# Altium PCB HDsEMG.PcbDoc
Units mm, origin at the board's own origin, x right, y up, seen from the top; angles counter-clockwise.
Board outline 76 x 31 mm, 2 copper layers (Top Layer, Bottom Layer); 160 components, 101 nets, 493 pads, 88 vias.
Unrouted connection lines stored in the file: 1.
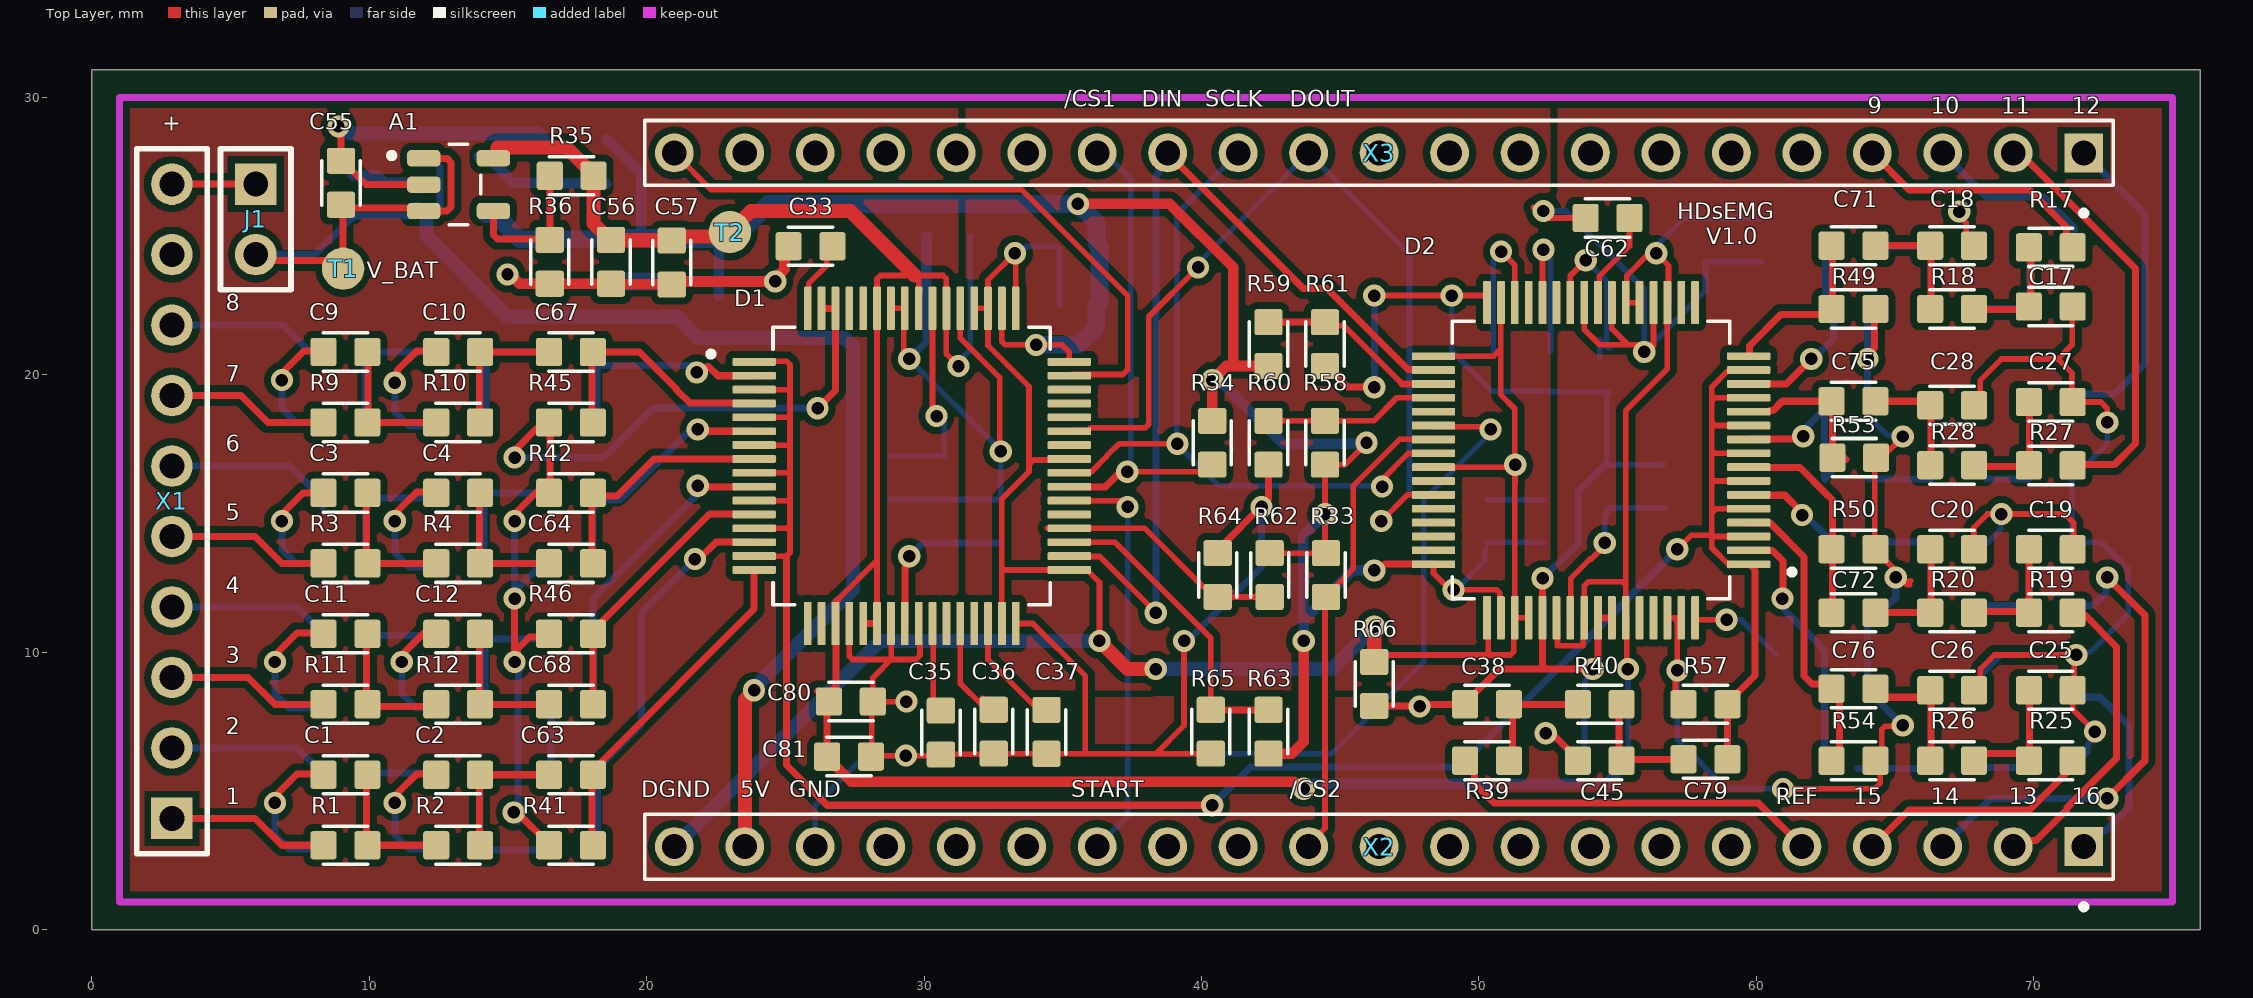
[diagram p0: Top Layer view]
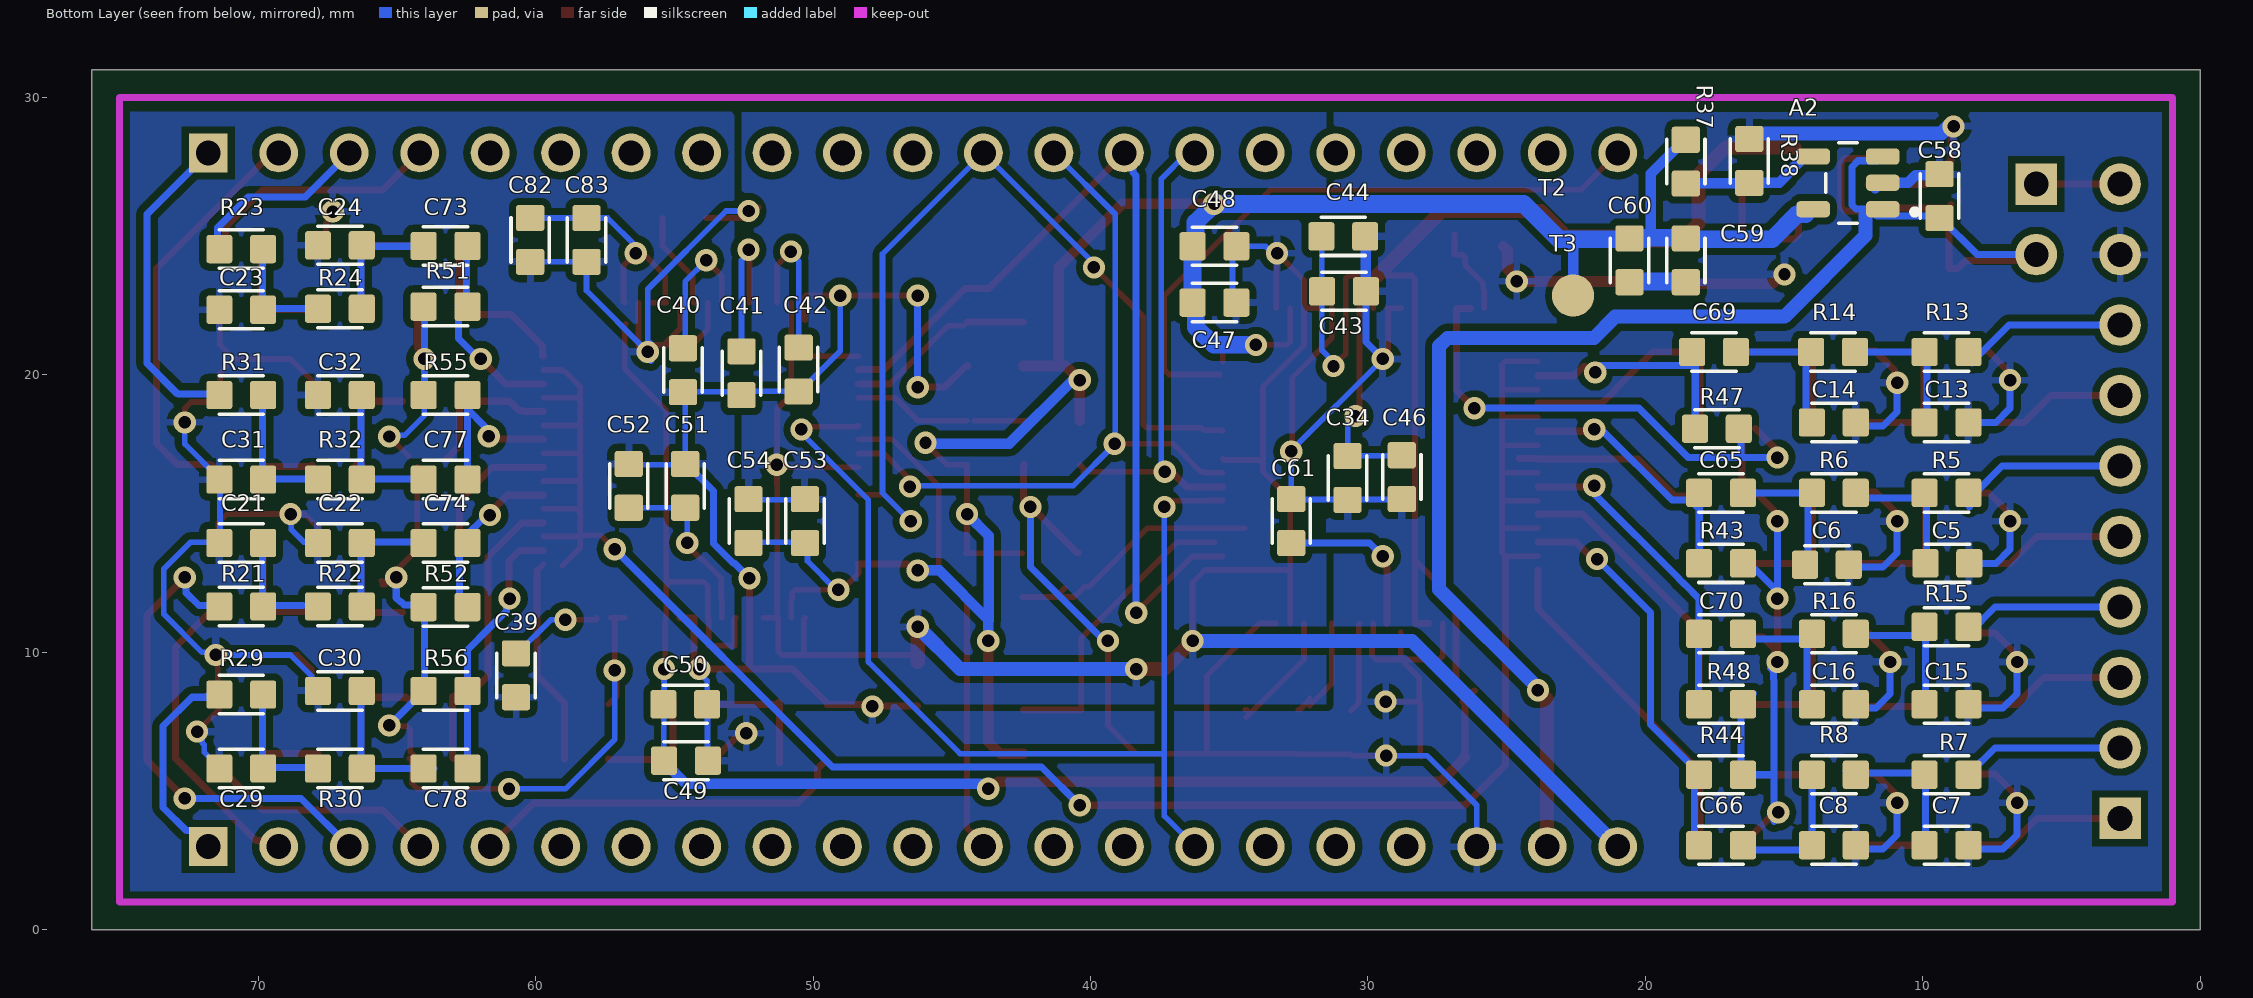
[diagram p1: Bottom Layer view, seen from below]
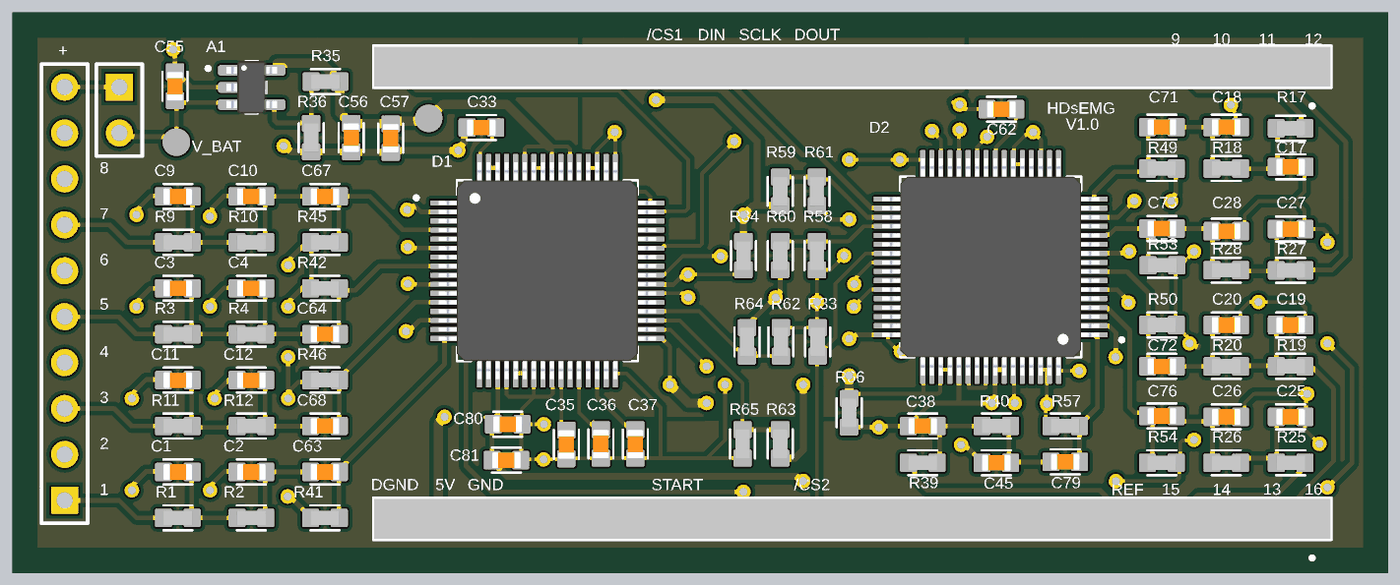
[diagram p2: 3D render of the assembled board from above, using the file's embedded part models]
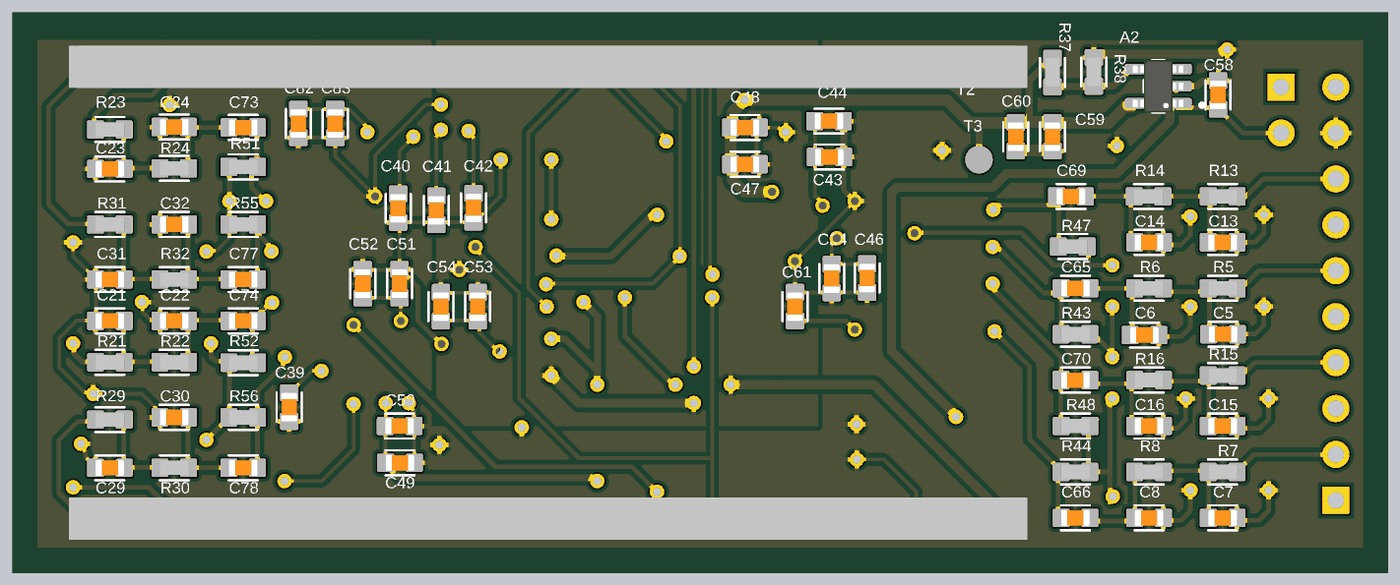
[diagram p3: 3D render of the assembled board from below, using the file's embedded part models]

## Layer stack, top to bottom
Top Solder: solder mask 0.01, Solder Resist, Dk 3.5
Top Layer: signal copper 0.036
Dielectric 1: dielectric 0.32, FR-4, Dk 4.8
Bottom Layer: signal copper 0.036
Bottom Solder: solder mask 0.01, Solder Resist, Dk 3.5

## Board outline
0,0 0,31 76,31 76,0

## Design rules (kind name [scope] priority, off if disabled: settings)
Clearance [All] p1: gap=0.254 ignorepadtopadclearanceinfootprint=TRUE except(0.127: Arc-SMDPad Track-SMDPad)
PolygonConnect [All] p1: connectstyle=Relief reliefconductorwidth=0.254 reliefentries=4 polygonreliefangle="90 Angle" airgapwidth=0.254
RoutingVias [All] p1: holewidth=0.711 width=1.27 viastyle="Through Hole" minholewidth=0.711 minwidth=1.27 maxholewidth=0.711 maxwidth=1.27
SolderMaskExpansion [All] p1: expansion=0.102 istentingtop=FALSE
Width [All] p1: maxlimit=1.016 minlimit=0.203 preferedwidth=0.254 minimp=50.000000 maximp=50.000000 favimp=50.000000
30 further rules are at their usual default settings.

## Classes and differential pairs
component class "Power supply": A1 A2 C55 C56 C57 C58 C59 C60 J1 R35 R36 R37 R38 R66 T1 T2 T3
component class Input2: C17 C18 C19 C20 C21 C22 C23 C24 C25 C26 C27 C28 C29 C30 C31 C32 C38 C45 C71 C72 C73 C74 C75 C76 C77 C78 C79 R17 R18 R19 R20 R21 R22 R23 R24 R25 R26 R27 R28 R29 R30 R31 R32 R39 R40 R49 R50 R51 R52 R53 R54 R55 R56 R57
component class Input1: C1 C2 C3 C4 C5 C6 C7 C8 C9 C10 C11 C12 C13 C14 C15 C16 C63 C64 C65 C66 C67 C68 C69 C70 R1 R2 R3 R4 R5 R6 R7 R8 R9 R10 R11 R12 R13 R14 R15 R16 R41 R42 R43 R44 R45 R46 R47 R48
component class ESP32: X1 X2 X3
component class ADS1298: C33 C34 C35 C36 C37 C39 C40 C41 C42 C43 C44 C46 C47 C48 C49 C50 C51 C52 C53 C54 C61 C62 C80 C81 C82 C83 D1 D2 R33 R34 R58 R59 R60 R61 R62 R63 R64 R65

## Components (designator, comment, footprint, x,y, rotation, side; value= is the part's Value field where it differs from the comment)
A1 "TPS73201DBVR" SOT95P280X145-5N 13.223,26.858 r0 top
A2 "TPS73201DBVR" SOT95P280X145-5N 12.7,26.924 r0 bottom
C1 "47pF" C0603 9.144,5.588 r0 top value=100pF
C2 "47pF" C0603 13.208,5.588 r0 top value=100pF
C3 "47pF" C0603 9.144,15.748 r0 top value=100pF
C4 "47pF" C0603 13.208,15.748 r0 top value=100pF
C5 "47pF" C0603 9.116,13.208 r0 bottom value=100pF
C6 "47pF" C0603 13.459,13.157 r0 bottom value=100pF
C7 "47pF" C0603 9.144,3.048 r0 bottom value=100pF
C8 "47pF" C0603 13.208,3.048 r0 bottom value=100pF
C9 "47pF" C0603 9.144,20.828 r0 top value=100pF
C10 "47pF" C0603 13.208,20.828 r0 top value=100pF
C11 "47pF" C0603 9.144,10.668 r0 top value=100pF
C12 "47pF" C0603 13.208,10.668 r0 top value=100pF
C13 "47pF" C0603 9.144,18.288 r0 bottom value=100pF
C14 "47pF" C0603 13.208,18.288 r0 bottom value=100pF
C15 "47pF" C0603 9.144,8.128 r0 bottom value=100pF
C16 "47pF" C0603 13.208,8.128 r0 bottom value=100pF
C17 "47pF" C0603 70.612,22.464 r180 top value=100pF
C18 "47pF" C0603 67.056,24.658 r180 top value=100pF
C19 "47pF" C0603 70.612,13.716 r180 top value=100pF
C20 "47pF" C0603 67.056,13.716 r180 top value=100pF
C21 "47pF" C0603 70.612,13.942 r180 bottom value=100pF
C22 "47pF" C0603 67.056,13.942 r180 bottom value=100pF
C23 "47pF" C0603 70.612,22.349 r180 bottom value=100pF
C24 "47pF" C0603 67.056,24.671 r180 bottom value=100pF
C25 "47pF" C0603 70.612,8.636 r180 top value=100pF
C26 "47pF" C0603 67.056,8.636 r180 top value=100pF
C27 "47pF" C0603 70.612,19.025 r180 top value=100pF
C28 "47pF" C0603 67.056,18.908 r180 top value=100pF
C29 "47pF" C0603 70.612,5.814 r180 bottom value=100pF
C30 "47pF" C0603 67.056,8.608 r180 bottom value=100pF
C31 "47pF" C0603 70.612,16.228 r180 bottom value=100pF
C32 "47pF" C0603 67.056,19.276 r180 bottom value=100pF
C33 "1nF" C0603 25.908,24.638 r180 top value=100pF
C34 "1uF" C0603 30.734,16.284 r270 bottom value=100pF
C35 "1uF" C0603 30.607,7.107 r270 top value=100pF
C36 "22uF" C0603 32.512,7.14 r270 top value=100pF
C37 "1uF" C0603 34.417,7.135 r270 top value=100pF
C38 "47pF" C0603 50.292,8.128 r0 top value=100pF
C39 "1nF" C0603 60.706,9.172 r270 bottom value=100pF
C40 "1uF" C0603 54.686,20.17 r270 bottom value=100pF
C41 "22uF" C0603 52.578,20.061 r270 bottom value=100pF
C42 "1uF" C0603 50.521,20.196 r270 bottom value=100pF
C43 "1uF" C0603 30.864,23.012 r180 bottom value=100pF
C44 "100nF" C0603 30.889,24.994 r180 bottom value=100pF
C45 "47pF" C0603 54.356,6.096 r0 top value=100pF
C46 "0.1uF" C0603 28.778,16.315 r270 bottom value=100pF
C47 "1uF" C0603 35.532,22.606 r180 bottom value=100pF
C48 "100nF" C0603 35.532,24.638 r180 bottom value=100pF
C49 "1uF" C0603 54.582,6.096 r180 bottom value=100pF
C50 "100nF" C0603 54.607,8.128 r180 bottom value=100pF
C51 "1uF" C0603 54.61,16.002 r90 bottom value=100pF
C52 "0.1uF" C0603 56.642,16.002 r90 bottom value=100pF
C53 "1uF" C0603 50.292,14.732 r90 bottom value=100pF
C54 "100nF" C0603 52.324,14.732 r90 bottom value=100pF
C55 "1uF" C0603 8.986,26.924 r270 top value=100pF
C56 "1uF" C0603 18.72,24.077 r90 top value=100pF
C57 "10uF" C0603 20.904,24.051 r90 top value=100pF
C58 "1uF" C0603 9.398,26.444 r270 bottom value=100pF
C59 "1uF" C0603 18.542,24.13 r90 bottom value=100pF
C60 "10uF" C0603 20.574,24.13 r90 bottom value=100pF
C61 "10uF" C0603 32.766,14.732 r270 bottom value=100pF
C62 "10uF" C0603 54.638,25.654 r0 top value=100pF
C63 "330nF" C0603 17.272,5.588 r180 top value=100pF
C64 "330nF" C0603 17.272,13.208 r180 top value=100pF
C65 "330nF" C0603 17.272,15.748 r180 bottom value=100pF
C66 "330nF" C0603 17.272,3.048 r180 bottom value=100pF
C67 "330nF" C0603 17.272,20.828 r180 top value=100pF
C68 "330nF" C0603 17.272,8.128 r180 top value=100pF
C69 "330nF" C0603 17.526,20.828 r180 bottom value=100pF
C70 "330nF" C0603 17.272,10.668 r180 bottom value=100pF
C71 "330nF" C0603 63.5,24.658 r0 top value=100pF
C72 "330nF" C0603 63.5,11.43 r0 top value=100pF
C73 "330nF" C0603 63.246,24.645 r0 bottom value=100pF
C74 "330nF" C0603 63.246,13.942 r0 bottom value=100pF
C75 "330nF" C0603 63.5,19.05 r0 top value=100pF
C76 "330nF" C0603 63.5,8.687 r0 top value=100pF
C77 "330nF" C0603 63.246,16.228 r0 bottom value=100pF
C78 "330nF" C0603 63.246,5.814 r0 bottom value=100pF
C79 "330nF" C0603 58.163,6.147 r180 top value=100pF
C80 "1uF" C0603 27.362,8.226 r0 top value=100pF
C81 "100nF" C0603 27.296,6.242 r0 top value=100pF
C82 "1uF" C0603 60.198,24.864 r270 bottom value=100pF
C83 "100nF" C0603 58.166,24.864 r270 bottom value=100pF
D1 "ADS1298IPAG" ADS1298 29.556,16.72 r0 top
D2 "ADS1298IPAG" ADS1298 54.042,16.926 r180 top
J1 "Header 2" HDR1X2 5.912,26.876 r270 top
R1 "22k1" RES0603 9.144,3.048 r0 top value=1K
R2 "10k" RES0603 13.208,3.048 r0 top value=1K
R3 "22k1" RES0603 9.144,13.208 r0 top value=1K
R4 "10k" RES0603 13.208,13.208 r0 top value=1K
R5 "22k1" RES0603 9.144,15.748 r0 bottom value=1K
R6 "10k" RES0603 13.208,15.748 r0 bottom value=1K
R7 "22k1" RES0603 9.144,5.588 r0 bottom value=1K
R8 "10k" RES0603 13.208,5.588 r0 bottom value=1K
R9 "22k1" RES0603 9.144,18.288 r0 top value=1K
R10 "10k" RES0603 13.208,18.288 r0 top value=1K
R11 "22k1" RES0603 9.144,8.128 r0 top value=1K
R12 "10k" RES0603 13.208,8.128 r0 top value=1K
R13 "22k1" RES0603 9.144,20.828 r0 bottom value=1K
R14 "10k" RES0603 13.236,20.828 r0 bottom value=1K
R15 "22k1" RES0603 9.144,10.922 r0 bottom value=1K
R16 "10k" RES0603 13.208,10.668 r0 bottom value=1K
R17 "22k1" RES0603 70.612,24.597 r180 top value=1K
R18 "10k" RES0603 67.056,22.372 r180 top value=1K
R19 "22k1" RES0603 70.612,11.43 r180 top value=1K
R20 "10k" RES0603 67.056,11.43 r180 top value=1K
R21 "22k1" RES0603 70.612,11.656 r180 bottom value=1K
R22 "10k" RES0603 67.056,11.656 r180 bottom value=1K
R23 "22k1" RES0603 70.612,24.534 r180 bottom value=1K
R24 "10k" RES0603 67.056,22.385 r180 bottom value=1K
R25 "22k1" RES0603 70.612,6.096 r180 top value=1K
R26 "10k" RES0603 67.056,6.096 r180 top value=1K
R27 "22k1" RES0603 70.612,16.739 r180 top value=1K
R28 "10k" RES0603 67.056,16.749 r180 top value=1K
R29 "22k1" RES0603 70.612,8.478 r180 bottom value=1K
R30 "10k" RES0603 67.056,5.814 r180 bottom value=1K
R31 "22k1" RES0603 70.612,19.276 r180 bottom value=1K
R32 "10k" RES0603 67.056,16.228 r180 bottom value=1K
R33 "10k" RES0603 44.49,12.784 r90 top value=1K
R34 "10k" RES0603 40.386,17.554 r90 top value=1K
R35 "47k7" RES0603 17.3,27.178 r0 top value=1K
R36 "32k" RES0603 16.51,24.077 r90 top value=1K
R37 "55k7" RES0603 18.542,27.686 r90 bottom value=1K
R38 "32k" RES0603 16.256,27.714 r270 bottom value=1K
R39 "22k1" RES0603 50.292,6.096 r0 top value=1K
R40 "10k" RES0603 54.356,8.128 r0 top value=1K
R41 "47k" RES0603 17.272,3.048 r0 top value=1K
R42 "47k" RES0603 17.272,15.748 r0 top value=1K
R43 "47k" RES0603 17.272,13.208 r0 bottom value=1K
R44 "47k" RES0603 17.272,5.588 r0 bottom value=1K
R45 "47k" RES0603 17.272,18.288 r0 top value=1K
R46 "47k" RES0603 17.272,10.668 r0 top value=1K
R47 "47k" RES0603 17.424,18.059 r0 bottom value=1K
R48 "47k" RES0603 17.272,8.128 r0 bottom value=1K
R49 "47k" RES0603 63.5,22.372 r180 top value=1K
R50 "47k" RES0603 63.5,13.716 r180 top value=1K
R51 "47k" RES0603 63.246,22.461 r180 bottom value=1K
R52 "47k" RES0603 63.246,11.631 r180 bottom value=1K
R53 "47k" RES0603 63.528,17.018 r180 top value=1K
R54 "47k" RES0603 63.5,6.096 r180 top value=1K
R55 "47k" RES0603 63.246,19.276 r180 bottom value=1K
R56 "47k" RES0603 63.246,8.608 r180 bottom value=1K
R57 "47k" RES0603 58.166,8.128 r0 top value=1K
R58 "10k" RES0603 44.45,17.554 r270 top value=1K
R59 "10k" RES0603 42.418,21.11 r270 top value=1K
R60 "10k" RES0603 42.418,17.554 r90 top value=1K
R61 "10k" RES0603 44.45,21.11 r90 top value=1K
R62 "10k" RES0603 42.458,12.784 r90 top value=1K
R63 "10k" RES0603 42.418,7.14 r270 top value=1K
R64 "10k" RES0603 40.584,12.784 r270 top value=1K
R65 "10k" RES0603 40.335,7.14 r90 top value=1K
R66 "0R" RES0603 46.228,8.862 r270 top value=1K
T1 "TP1" PCBComponent_1#1 9.062,23.828 r0 top
T2 "TP2" PCBComponent_1#2 35.382,24.892 r180 bottom
T3 "TP3" PCBComponent_1#1 22.606,22.86 r180 bottom
X1 "Header 10" HDR1X10 2.89,4.016 r90 top
X2 "7-2267062-1" TE_7-2267062-1 46.4,3 r180 top
X3 "7-2267062-1" TE_7-2267062-1 46.4,28 r180 top

## Footprints (in the part's own frame and the unit in brackets; to place one, negate y for a bottom-side part, rotate by r counter-clockwise, add the part's x,y. Pads: shape width x height; smd on the part's side, far side on the other; paste and mask are expansions set on the pad)
ADS1298 [mm]
  rrect25% 1.56x0.28 smd: 1(-5.68,3.75) 2(-5.68,3.25) 3(-5.68,2.75) 4(-5.68,2.25) 5(-5.68,1.75) 6(-5.68,1.25) 7(-5.68,0.75) 8(-5.68,0.25) 9(-5.68,-0.25) 10(-5.68,-0.75) 11(-5.68,-1.25) 12(-5.68,-1.75) 13(-5.68,-2.25) 14(-5.68,-2.75) 15(-5.68,-3.25) 16(-5.68,-3.75) 33(5.68,-3.75) 34(5.68,-3.25) 35(5.68,-2.75) 36(5.68,-2.25) 37(5.68,-1.75) 38(5.68,-1.25) 39(5.68,-0.75) 40(5.68,-0.25) 41(5.68,0.25) 42(5.68,0.75) 43(5.68,1.25) 44(5.68,1.75) 45(5.68,2.25) 46(5.68,2.75) 47(5.68,3.25) 48(5.68,3.75)
  rrect25% 0.28x1.56 smd: 17(-3.75,-5.68) 18(-3.25,-5.68) 19(-2.75,-5.68) 20(-2.25,-5.68) 21(-1.75,-5.68) 22(-1.25,-5.68) 23(-0.75,-5.68) 24(-0.25,-5.68) 25(0.25,-5.68) 26(0.75,-5.68) 27(1.25,-5.68) 28(1.75,-5.68) 29(2.25,-5.68) 30(2.75,-5.68) 31(3.25,-5.68) 32(3.75,-5.68) 49(3.75,5.68) 50(3.25,5.68) 51(2.75,5.68) 52(2.25,5.68) 53(1.75,5.68) 54(1.25,5.68) 55(0.75,5.68) 56(0.25,5.68) 57(-0.25,5.68) 58(-0.75,5.68) 59(-1.25,5.68) 60(-1.75,5.68) 61(-2.25,5.68) 62(-2.75,5.68) 63(-3.25,5.68) 64(-3.75,5.68)
  silkscreen extent -7.34,-5 5,5, body extent -6,-6 6,6, height 1.2
C0603 [mm]
  rrect20% 0.94x1.02 smd: 1(-0.79,0) 2(0.79,0)
  silkscreen extent -0.8,-0.69 0.8,0.69, body extent -0.8,-0.45 0.8,0.45, height 0.81
HDR1X2 [mm] "Connector; Header; 2 Position"
  rect 1.5x1.5 hole 0.9: 1(0,0)
  round 1.5 hole 0.9: 2(2.54,0)
  silkscreen extent -1.27,-1.27 3.81,1.27
HDR1X10 [mm] "Connector; Header; 10 Position"
  rect 1.5x1.5 hole 0.9: 1(0,0)
  round 1.5 hole 0.9: 2(2.54,0) 3(5.08,0) 4(7.62,0) 5(10.16,0) 6(12.7,0) 7(15.24,0) 8(17.78,0) 9(20.32,0) 10(22.86,0)
  silkscreen extent -1.27,-1.27 24.13,1.27
PCBComponent_1#1 [mil]
  round 60 smd: 1(0,0)
PCBComponent_1#2 [mil]
  round 60 smd far side: 1(487.49,10)
RES0603 [mm]
  rrect20% 0.94x1.02 smd: 1(-0.79,0) 2(0.79,0)
  silkscreen extent -0.8,-0.69 0.8,0.69, body extent -0.8,-0.4 0.8,0.4, height 0.45
SOT95P280X145-5N [mm]
  rrect50% 1.21x0.59 smd: 1(-1.255,0.95) 2(-1.255,0) 3(-1.255,-0.95) 4(1.255,-0.95) 5(1.255,0.95)
  silkscreen extent -2.51,-1.45 0.8,1.45, body extent -1.4,-1.45 1.4,1.45, height 1.45
TE_7-2267062-1 [mm]
  rect 1.398x1.398 hole 0.89: 1(-25.4,0)
  round 1.398 hole 0.89: 2(-22.86,0) 3(-20.32,0) 4(-17.78,0) 5(-15.24,0) 6(-12.7,0) 7(-10.16,0) 8(-7.62,0) 9(-5.08,0) 10(-2.54,0) 11(0,0) 12(2.54,0) 13(5.08,0) 14(7.62,0) 15(10.16,0) 16(12.7,0) 17(15.24,0) 18(17.78,0) 19(20.32,0) 20(22.86,0) 21(25.4,0)
  silkscreen extent -26.47,-1.17 26.47,2.27, body extent -26.47,-1.17 26.47,1.17, height 8.08

## Part data
A1 A2: "250-mA, high-accuracy, ultra-low-dropout voltage regulator with reverse current protection & enable 5-SOT-23 -40 to 125", Package="SOT-23-5 Texas Instruments", Arrow_Electronics-Purchase-URL=https://snapeda.com/shop?store=Arrow+Electronics&id=76590, DigiKey-Purchase-URL=https://snapeda.com/shop?store=DigiKey&id=76590, MF="Texas Instruments", Mouser-Purchase-URL=https://snapeda.com/shop?store=Mouser&id=76590, MP=TPS73201DBVR, SnapEDA_Link=https://www.snapeda.com/parts/TPS73201DBVR/Texas%20Instruments/view-part/76590/?ref=snap, Texas_Instruments-Purchase-URL=https://snapeda.com/shop?store=Texas+Instruments&id=76590
C1 C2 C3 C4 C5 C6 C7 C8 C9 C10 C11 C12 C13 C14 C15 C16 C17 C18 C19 C20 C21 C22 C23 C24 C25 C26 C27 C28 C29 C30 C31 C32 C33 C34 C35 C36 C37 C38 C39 C40 C41 C42 C43 C44 C45 C46 C47 C48 C49 C50 C51 C52 C53 C54 C55 C56 C57 C58 C59 C60 C61 C62 C63 C64 C65 C66 C67 C68 C69 C70 C71 C72 C73 C74 C75 C76 C77 C78 C79 C80 C81 C82 C83: library part Cap, "Capacitor", LatestRevisionDate=17-Jul-2002, LatestRevisionNote="Re-released for DXP Platform.", PackageDescription="Radial Cap, Thru-Hole; 2 Leads; 0.3 in Pin Spacing", PackageReference=RAD-0.3, Published=8-Jun-2000, Publisher="Altium Limited"
D1 D2: "Integrated Circuit", Manufacturer_Name="Texas Instruments", Mouser Part Number=595-ADS1298IPAG, Arrow Part Number=ADS1298IPAG, Arrow Price/Stock=https://www.arrow.com/en/products/ads1298ipag/texas-instruments, Datasheet Link=http://www.ti.com/lit/ds/symlink/ads1298.pdf, Height=1.2mm, Manufacturer_Part_Number=ADS1298IPAG, Mouser Price/Stock=https://www.mouser.co.uk/ProductDetail/Texas-Instruments/ADS1298IPAG?qs=Z6FgPJT5dDR3VNlC6H4EKg%3D%3D
J1: "Header, 2-Pin", LatestRevisionDate=17-Jul-2002, LatestRevisionNote="Re-released for DXP Platform.", Publisher="Altium Limited"
R1 R2 R3 R4 R5 R6 R7 R8 R9 R10 R11 R12 R13 R14 R15 R16 R17 R18 R19 R20 R21 R22 R23 R24 R25 R26 R27 R28 R29 R30 R31 R32 R33 R34 R35 R36 R37 R38 R39 R40 R41 R42 R43 R44 R45 R46 R47 R48 R49 R50 R51 R52 R53 R54 R55 R56 R57 R58 R59 R60 R61 R62 R63 R64 R65 R66: library part Res2, "Resistor", LatestRevisionDate=17-Jul-2002, LatestRevisionNote="Re-released for DXP Platform.", PackageDescription="Axial Device, Thru-Hole; 2 Leads; 0.4 in Pin Spacing", PackageReference=AXIAL-0.4, Published=8-Jun-2000, Publisher="Altium Limited"
T1 T2 T3: library part Component_1
X1: "Header, 10-Pin", LatestRevisionDate=17-Jul-2002, LatestRevisionNote="Re-released for DXP Platform.", Publisher="Altium Limited"
X2 X3: Package=None, Availability=Unavailable, MP=7-2267062-1, Price=None

## Via types
v1: diameter 0.8, hole 0.45, Top Layer to Bottom Layer, 88 vias

## Nets (pads, with @x,y where several pads share a name; then routed paths per layer and width w, separated by ;. In a path a pad name is that pad's centre, name@x,y a point inside that pad or via, vN(x,y) a via of type N, cw(c..) or ccw(c..) an arc to the next point about the centre after c; other vN are vias at no path point)
/CS1: D1.39 R34.1 X3.15 | length 17.5
  Top Layer w0.203: v1(37.322,16.51) R34.1@40.132,16.51 ; R34.1@40.259,16.51 R34.1@40.132,16.51 ; R34.1 40.195,16.574 R34.1@40.132,16.51
  Top Layer w0.254: D1.39 35.249,15.957 35.969,15.957 35.973,15.953 36.527,15.953 37.084,16.51 v1(37.322,16.51)
  Bottom Layer w0.203: X3.15 36.516,28 37.452,27.064 37.452,16.802 37.436,16.786 37.436,16.779 v1@37.452,16.763
/CS2: D2.39 R33.1 X2.12 | length 17.2
  Top Layer w0.203: X2.12 43.86,3.071 44.45,3.661 44.45,11.954 R33.1 ; R33.1@44.53,11.994 44.898,12.362 44.898,12.442 45.466,13.01 45.466,16.002 47.14,17.676 D2.39
/PWDN1: D1.35 R63.1 R65.2 | length 10.9
  Top Layer w0.203: D1.35@35.528,13.97 36.883,13.97 40.335,10.517 R65.2
  Top Layer w0.254: R65.2 R63.1
/PWDN2: D2.35 R59.1 R61.2 | length 6.9
  Top Layer w0.203: R61.2 44.584,21.766 45.146,21.766 47.236,19.676
  Top Layer w0.254: R59.1 R61.2 ; 47.236,19.676 D2.35
/RESET1: D1.36 R62.1 R64.2 | length 9.2
  Top Layer w0.203: 34.452,14.478 35.236,14.478 37.942,14.478 40.058,12.362 40.216,12.362 R64.2 R62.1 ; R64.2@40.937,12.307 R64.2@41.052,12.192
/RESET2: D2.36 R58.1 R60.2 | length 6.3
  Top Layer w0.203: R60.2@42.164,18.344 R60.2 R58.1@44.196,18.344 ; R58.1 46.207,18.344 47.039,19.176 D2.36
AVDD: A1.5 C43.1 C44.1 C49.1 C50.1 C56.2 C57.2 C80.1 C81.1 C82.1 C83.1 D1.19 D1.21 D1.22 D1.54 D1.56 D1.59 D2.19 D2.21 D2.22 D2.54 D2.56 D2.59 R35.2 T2.1 | length 113.9
  Top Layer w0.203: D1.19 26.819,11.053 D1.19@26.823,11.057 ; 26.896,11.91 28.306,13.32 ; D1.22 28.306,13.32 ; D1.56 29.806,23.443 29.664,23.585 ; v1(31.242,20.32) 30.806,20.756 D1.54 30.806,23.466 30.687,23.585 29.664,23.585 ; D2.54 52.83,11.208 52.83,10.237 53.754,10.237 53.754,11.208 D2.56 53.792,12.39 53.947,12.545 55.173,12.545 55.292,12.426 ; v1(55.372,9.398) 55.33,9.44 55.33,11.208 D2.59 55.292,12.426 ; D2.21 D2.22 55.33,22.644 55.33,23.58 56.134,24.384 v1(56.388,24.384) 56.832,23.94 56.832,23.402 56.83,23.4 56.83,22.644 D2.19 ; D2.19@56.749,21.844 56.788,21.805 56.788,20.212 55.292,18.716 55.292,12.426 ; 28.306,13.32 D1.59 28.306,23.466 28.425,23.585 29.664,23.585
  Top Layer w0.254: A1.5 14.478,28.045 14.627,28.194 ; R35.2 R35.2@18.09,27.218 ; C56.2@18.68,24.867 C56.2 C56.2@18.732,24.854 ; C57.2@20.892,24.854 C57.2 C57.2@21.057,24.994 ; T2.1@22.848,24.994 T2.1 ; C80.1@26.154,8.605 cw(c26.09,8.388) C80.1@26.25,8.548 ; C80.1@26.25,8.548 26.278,8.52 26.382,8.417 C80.1@26.42,8.379 ; C81.1 C80.1@26.506,8.274 ; C80.1@26.572,8.226 26.477,8.321 C80.1@26.42,8.379 ; D1.19@26.819,11.053 26.819,11.833 26.896,11.91 ; D1.19@26.823,11.057 26.823,8.782 C80.1@26.42,8.379 ; D1.21 D1.22
  Top Layer w0.381: C81.1 26.506,6.202 27.374,5.334 43.327,5.334 43.575,5.086 v1(43.688,5.086)
  Top Layer w0.508: 14.627,28.194 17.114,28.194 R35.2@18.09,27.218 ; R35.2 18.09,25.456 C56.2@18.68,24.867 ; C56.2@18.732,24.854 C57.2@20.892,24.854 ; C57.2@21.057,24.994 T2.1@22.848,24.994 ; T2.1 23.762,25.908 27.341,25.908 29.664,23.585
  Bottom Layer w0.203: v1(31.242,20.32) 31.242,20.468 31.666,20.892 31.666,24.981 C44.1 ; C49.1 55.385,6.109 55.385,8.115 C50.1 55.372,8.153 v1(55.372,9.398) ; v1(56.388,24.384) 56.388,24.638 57.404,25.654 C83.1 C82.1
  Bottom Layer w0.381: v1(43.688,5.086) 43.801,5.086 43.983,5.268 54.584,5.268 55.372,6.056 C49.1
BAT: J1.1 X1.10 | length 3
  Top Layer w0.254: X1.10 J1.1
BAT_GND: A1.2 A2.2 C1.1 C2.1 C3.1 C4.1 C5.1 C6.1 C7.1 C8.1 C9.1 C10.1 C11.1 C12.1 C13.1 C14.1 C15.1 C16.1 C17.1 C18.1 C19.1 C20.1 C21.1 C22.1 C23.1 C24.1 C25.1 C26.1 C27.1 C28.1 C29.1 C30.1 C31.1 C32.1 C33.2 C34.2 C35.2 C36.2 C37.2 C38.1 C39.2 C40.2 C41.2 C42.2 C43.2 C44.2 C45.1 C46.2 C49.2 C50.2 C51.2 C52.2 C55.1 C56.1 C57.1 C58.1 C59.1 C60.1 C61.1 C62.1 C80.2 C81.2 C82.2 C83.2 D1.20 D1.23 D1.25 D1.32 D1.53 D1.57 D1.58 D2.20 D2.23 D2.25 D2.32 D2.53 D2.57 D2.58 R36.1 R38.1 R60.1 R61.1 R64.1 R65.1 R66.2 X1.9 X2.19 | length 253.7
  Top Layer w0.203: D1.20 27.306,9.862 27.425,9.743 28.814,9.743 ; C81.2 C81.2@28.119,6.275 ; D1.58 D1.57 29.268,22.362 29.268,20.77 v1(29.464,20.574) ; D1.23@28.814,10.716 28.814,9.743 ; v1(29.366,8.226) C80.2 ; D1.25 29.806,10.4 29.819,10.387 29.819,10.307 29.854,10.272 29.854,9.892 29.705,9.743 28.814,9.743 ; D1.53 31.306,21.325 32.725,19.906 32.725,17.285 v1(32.766,17.244) ; D1.32 33.918,11.04 35.814,9.144 35.814,6.347 ; v1(39.37,10.414) 39.37,7.363 38.354,6.347 ; R65.1 40.333,6.347 38.354,6.347 ; v1(46.228,22.86) v1(49.022,22.86) 50.254,22.86 50.292,22.822 D2.32 D2.32@50.292,21.966 ; v1@51.956,26.048 52.096,25.908 v1(52.324,25.908) 52.578,25.654 C62.1 ; D2.25 53.792,21.646 54.353,21.085 55.369,21.085 ; D2.23 54.792,21.662 55.369,21.085 ; v1@55.957,21.085 55.369,21.085 ; 56.292,21.062 D2.20 ; v1(67.31,25.889) 67.31,25.728 67.565,25.473 67.565,24.962 C18.1@68.082,24.444 ; C26.1@67.818,8.536 68.072,8.79 68.072,9.398 68.58,9.906 v1(71.527,9.906) 71.461,9.84 C25.1@71.461,8.695 ; C20.1 67.846,14.506 68.326,14.986 v1(68.834,14.986) 71.12,14.986 71.435,14.671 71.435,13.94 C19.1@71.77,13.604 ; C28.1@68.052,18.908 68.072,18.928 68.072,19.812 68.834,20.574 70.866,20.574 ; C25.1 71.402,7.946 v1(72.203,7.145) ; C27.1 C27.1@71.679,19.025 ; C17.1@71.461,22.21 71.38,22.13 71.38,21.088 70.866,20.574 ; v1(72.644,18.288) 72.644,18.796 72.415,19.025 C27.1@71.679,19.025 ; C81.2@28.119,6.275 28.123,6.279 v1(29.347,6.279) 30.57,6.279 C35.2 30.624,6.333 32.495,6.333 C36.2 32.515,6.347 34.414,6.347 C37.2 34.42,6.347 35.814,6.347 ; C81.2@28.119,6.275 28.119,8.193 C80.2 ; C80.2 28.152,9.082 28.814,9.743 ; 35.814,6.347 38.354,6.347 ; 70.866,20.574 71.374,20.066 71.374,19.329 C27.1@71.679,19.025
  Top Layer w0.254: v1(6.604,4.572) 6.708,4.676 6.708,4.93 7.398,5.62 8.068,5.62 C1.1@8.1,5.588 ; v1(6.604,9.652) 6.708,9.756 6.708,10.01 7.398,10.7 8.068,10.7 C11.1@8.1,10.668 ; v1(6.858,14.732) 6.962,14.836 6.962,15.09 7.62,15.748 C3.1 ; v1(6.858,19.812) 6.962,19.916 6.962,20.17 7.652,20.86 8.322,20.86 C9.1 ; C1.1@8.08,5.461 8.281,5.661 C1.1 ; v1(8.89,28.956) 8.89,29.21 8.986,29.114 C55.1 9.026,27.714 9.882,26.858 A1.2 ; v1(10.922,4.572) 11.026,4.676 11.026,4.93 11.716,5.62 12.386,5.62 C2.1 ; v1(10.922,14.732) 11.026,14.836 11.026,15.09 11.716,15.78 12.386,15.78 C4.1 ; v1(10.922,19.717) 10.922,19.812 11.026,19.916 11.026,20.17 11.716,20.86 12.386,20.86 C10.1 ; v1(11.176,9.652) 11.28,9.756 11.28,10.01 11.97,10.7 12.64,10.7 C12.1@12.672,10.668 ; C57.1@20.892,23.274 C57.1 ; R64.1@40.426,13.574 40.466,13.574 42.418,15.526 R60.1 R60.1@42.378,16.764 ; R61.1@44.41,20.32 R61.1 44.49,20.32 45.252,19.558 v1(46.228,19.558) ; R66.2 46.238,8.062 47.851,8.062 v1(47.861,8.052) 47.938,8.128 C38.1 49.502,8.168 50.732,9.398 52.37,9.398 ; v1(52.292,12.668) D2.53 52.292,9.523 52.324,9.491 52.324,9.444 52.37,9.398 ; v1(52.408,7.087) 52.615,7.087 53.566,6.136 C45.1 ; D2.58 D2.57 54.292,9.749 54.102,9.559 v1(54.102,9.398) 52.37,9.398
  Top Layer w0.381: v1(14.986,23.622) 15.083,23.622 15.419,23.287 R36.1 C56.1 18.732,23.274 C57.1@20.892,23.274 ; C57.1 21.011,23.368 v1(24.638,23.368) ; v1@24.669,23.368 v1(24.638,23.368) ; C33.2 24.971,24.491 24.971,23.814 24.638,23.481 v1(24.638,23.368)
  Bottom Layer w0.203: X2.19 26.08,4.49 27.869,6.279 v1(29.347,6.279) ; C46.2 28.794,15.509 30.719,15.509 C34.2 30.748,15.508 32.752,15.508 C61.1 v1(32.766,17.244) 32.766,17.272 v1(29.464,20.574) ; v1(49.022,22.86) 49.022,20.864 50.481,19.406 C42.2 52.578,19.406 52.591,19.393 54.673,19.393 C40.2 ; v1(52.324,25.908) 53.139,25.908 55.957,23.089 v1@55.957,20.908 ; C49.2 53.805,6.109 53.805,8.115 C50.2 53.817,8.981 54.102,9.265 v1(54.102,9.398) ; C40.2@54.61,19.342 C51.2 54.638,16.764 56.614,16.764 C52.2 ; v1@55.843,20.497 55.843,20.714 v1(55.957,20.828) ; v1@55.877,21.159 55.877,20.908 v1(55.957,20.828) ; C82.2 C83.2 58.166,23.037 v1(55.957,20.828) ; C30.1@68.072,8.41 68.072,9.144 68.834,9.906 v1(71.527,9.906) 71.619,9.998 72.026,9.998 73.4,11.371 73.4,13.013 72.443,13.97 C21.1@71.656,13.97 ; 68.354,13.97 68.807,14.423 68.807,14.959 v1(68.834,14.986) ; C29.1 71.402,5.854 71.95,6.402 71.95,6.672 72.018,6.74 72.018,6.798 72.203,6.983 v1(72.203,7.145) ; C21.1 71.374,13.97 71.374,16.2 C31.1 71.402,16.268 72.644,17.51 v1(72.644,18.288)
  Bottom Layer w0.254: v1@6.611,4.437 6.611,3.421 7.119,2.913 C7.1@8.079,2.913 ; v1@6.611,9.517 6.611,8.501 7.119,7.993 C15.1@8.079,7.993 ; v1(6.858,14.732) 6.858,13.716 7.366,13.208 C5.1 ; v1(6.858,19.812) 6.858,18.796 7.366,18.288 C13.1 ; v1@10.929,4.437 10.929,3.421 11.437,2.913 C8.1@12.397,2.913 ; v1@10.929,14.597 10.929,13.581 11.437,13.073 C6.1@12.397,13.073 ; v1@10.929,19.677 10.929,18.661 11.437,18.153 C14.1@12.397,18.153 ; v1@11.183,9.517 11.183,8.501 11.691,7.993 C16.1@12.651,7.993 ; v1(29.464,20.574) 30.074,21.184 C43.2 ; v1(39.37,10.414) 39.497,10.414 42.164,13.081 v1(42.164,15.24) ; v1(46.228,19.558) v1(46.228,22.86) ; v1(52.292,12.668) 52.842,13.218 52.884,13.218 53.594,13.928 53.594,15.816 54.57,16.792 C51.2
  Bottom Layer w0.381: C58.1 9.428,27.204 10.256,27.204 10.536,26.924 A2.2 11.61,26.924 11.714,26.819 A2.2@11.714,26.736 ; C43.2 30.086,23.025 30.086,24.981 C44.2
  Bottom Layer w0.508: v1(8.89,28.956) 8.946,28.9 9.137,28.9 9.335,28.702 16.058,28.702 R38.1
  Bottom Layer w0.635: C59.1@18.542,23.368 C60.1@20.32,23.368
DGND: C47.2 C48.2 C53.2 C54.2 D1.31 D1.33 D1.41 D1.49 D1.51 D1.52 D2.31 D2.33 D2.41 D2.49 D2.51 D2.52 R66.1 X2.21 | length 87
  Top Layer w0.203: D1.52 D1.51 ; D1.31 32.806,12.954 ; D1.49 33.306,24.416 v1(33.274,24.384) 32.306,23.416 D1.51 ; D1.41 35.198,16.932 33.95,16.932 33.782,16.764 ; v1(36.322,10.414) 36.322,12.524 35.876,12.97 D1.33 32.822,12.97 32.806,12.954 ; R66.1 46.482,9.906 50.449,9.906 ; D2.41 51.22,16.676 v1@51.292,16.748 ; D2.33 50.525,20.676 50.792,20.943 ; D2.49 50.33,11.208 50.33,10.025 50.449,9.906 ; D2.31 50.792,20.943 ; v1@51.292,16.676 51.292,16.018 ; v1@51.308,16.676 51.308,16.034 51.292,16.018 ; v1(51.308,16.764) v1@51.292,16.748 ; D2.52 D2.51 ; D1.51 32.306,21.054 33.025,20.336 33.782,19.578 33.782,16.764 ; 32.806,12.954 32.806,15.534 33.782,16.51 33.782,16.764 ; 50.449,9.906 51.135,9.906 51.254,10.025 51.254,11.208 D2.51 ; 50.792,20.943 50.792,19.28 51.292,18.78 v1@51.292,16.748 ; D2.51 51.292,16.018
  Top Layer w0.508: v1(36.322,10.414) 37.338,9.398 v1(38.354,9.398) ; R66.1 v1(46.228,10.922)
  Bottom Layer w0.203: v1(33.274,24.384) 33.435,24.384 33.689,24.638 C48.2 ; C47.2@34.882,22.506 C48.2@34.882,24.538 ; C53.2 50.32,15.494 52.296,15.494 C54.2
  Bottom Layer w0.508: X2.21 28.414,10.414 v1(36.322,10.414) ; v1(38.354,9.398) 44.704,9.398 v1(46.228,10.922)
DIN: D1.34 D2.34 X3.14 | length 33.5
  Top Layer w0.203: D1.34 35.253,13.453 36.331,13.453 v1(38.354,11.43)
  Top Layer w0.254: X3.14 43.666,23.114 44.52,23.114 47.445,20.189 48.357,20.189 D2.34@48.362,20.184
  Bottom Layer w0.254: v1(38.354,11.43) 38.354,27.178 38.468,27.292 38.468,27.379 38.78,27.69 X3.14
DOUT: D1.43 D2.43 X3.12 | length 32.6
  Top Layer w0.203: D1.43 35.274,18.008 35.914,18.008 36.007,18.101 37.981,18.101 38.1,18.22 38.1,22.098 v1(39.878,23.876) ; v1(46.482,14.732) 47.432,15.682 48.356,15.682 D2.43
  Bottom Layer w0.203: v1(39.878,23.876) 39.878,24.018 X3.12 47.498,24.362 47.498,15.748 v1(46.482,14.732)
DRDY: D1.47 X3.21 | length 23.2
  Top Layer w0.203: X3.21 22.33,26.67 33.528,26.67 37.338,22.86 37.338,20.185 37.166,20.013 D1.47@35.339,20.013
DVDD: A2.5 C47.1 C48.1 C53.1 C54.1 C59.2 C60.2 D1.48 D1.50 D2.48 D2.50 R33.2 R34.2 R37.2 R58.2 R59.2 R62.2 R63.2 T3.1 | length 90.6
  Top Layer w0.203: D1.50 32.806,21.201 32.925,21.082 v1(34.036,21.082) 34.976,21.082 35.236,20.822 D1.48 ; R62.2 R33.2@44.45,13.574 ; R33.2 R33.2@44.45,13.574 ; v1(45.948,17.552) 45.948,17.538 45.174,16.764 R58.2 v1(44.45,14.986) R33.2@44.45,13.574 ; D2.48 48.364,13.174 48.364,12.85 48.959,12.255 v1(49.085,12.255) 50.638,12.255 50.754,12.139 50.754,11.924 50.792,11.886 D2.50
  Top Layer w0.254: v1(46.228,12.954) 46.376,12.954 46.601,13.179 48.359,13.179 D2.48
  Top Layer w0.381: v1(35.548,26.162) 38.862,26.162 41.148,23.876 41.148,20.32 ; R34.2 v1(40.386,19.812) 40.894,20.32 41.148,20.32 ; R63.2 43.256,6.35 43.688,6.782 v1(43.688,10.414) ; R59.2 41.148,20.32
  Bottom Layer w0.203: v1(49.085,12.255) 49.169,12.255 50.2,13.286 50.2,13.658 C53.1@50.259,13.716 ; C53.1 50.32,13.97 52.296,13.97 C54.1
  Bottom Layer w0.381: R37.2 18.582,28.476 19.812,27.246 19.812,24.948 ; T3.1 22.606,24.892 ; v1(40.386,19.812) 40.64,19.812 42.926,17.526 45.921,17.526 v1(45.948,17.552) ; v1(43.688,10.414) 43.688,11.131 43.662,11.157 ; v1(44.45,14.986) 43.662,14.198 43.662,11.157 ; v1(46.228,12.954) 45.458,12.954 43.662,11.157
  Bottom Layer w0.635: A2.5@14.224,25.786 14.534,25.786 15.428,24.892 C59.2@18.034,24.892 ; C59.2@18.316,24.976 18.288,24.948 19.812,24.948 C60.2@20.32,24.948 ; C60.2@20.066,24.892 22.606,24.892 23.114,24.892 24.384,26.162 v1(35.548,26.162) 36.214,25.496 36.214,24.746 C48.1 C47.1 36.202,22.486 36.202,21.724 35.56,21.082 v1(34.036,21.082)
ESP32_5V_pin: A1.1 A1.3 A2.1 A2.3 C55.2 C58.2 J1.2 T1.1 X2.20 | length 59.9
  Top Layer w0.254: J1.2 6.118,24.13 8.451,24.13 8.753,23.828 T1.1 C55.2@9.062,26.058 ; C55.2 C55.2@9.062,26.058 ; A1.1 12.805,27.808 12.954,27.659 12.954,26.057 12.805,25.908 A1.3 11.855,26.021 9.099,26.021 C55.2@9.062,26.058
  Top Layer w0.508: X2.20 23.54,8.3 v1(23.876,8.636)
  Bottom Layer w0.254: J1.2 8.04,24.336 9.358,25.654 C58.2 9.464,25.72 11.648,25.72 A2.1@11.714,25.786 ; A2.1 A2.1@11.669,25.974 ; A2.3 11.6,27.719 12.332,27.719 12.553,27.498 12.553,26.123 12.404,25.974 A2.1@11.755,25.974
  Bottom Layer w0.508: A2.1@11.669,25.974 A2.1@11.755,25.974 ; 12.065,25.745 12.065,25.019 14.986,22.098 21.089,22.098 21.851,21.336 27.134,21.336 27.432,21.038 27.432,12.271 v1@23.836,8.676
IN1: C63.1 D1.16 R41.2 | length 12.6
  Top Layer w0.254: R41.2 18.034,3.076 18.034,5.56 C63.1 ; C63.1@18.183,5.311 18.371,5.5 18.371,6.054 23.876,11.558 D1.16
IN1C: R1.1 X1.1 | length 5.7
  Top Layer w0.254: X1.1 5.89,4.016 6.858,3.048 R1.1@8.203,3.048
IN2: C66.1 D1.14 R44.2 | length 14.4
  Top Layer w0.254: v1(21.744,13.362) 21.848,13.466 22.002,13.466 22.506,13.97 D1.14
  Bottom Layer w0.254: C66.1@18.227,2.804 18.227,5.705 18.192,5.74 18.192,5.78 19.812,7.401 19.812,11.43 v1(21.744,13.362)
IN2C: R7.1 X1.2 | length 5.9
  Bottom Layer w0.254: X1.2 7.398,6.556 8.326,5.628 R7.1@8.326,5.588
IN3: C68.1 D1.12 R46.2 | length 10.2
  Top Layer w0.254: R46.2@17.962,10.749 R46.2@18.04,10.749 ; C68.1 R46.2 ; R46.2@18.301,10.681 18.301,11.023 22.26,14.983 23.863,14.983 D1.12
IN3C: R11.1 X1.3 | length 6
  Top Layer w0.254: X1.3 5.636,9.096 6.604,8.128 R11.1@8.518,8.128
IN4: C70.1 D1.10 R48.2 | length 11.2
  Top Layer w0.254: v1(21.844,16.002) 21.879,15.967 23.873,15.967 D1.10
  Bottom Layer w0.254: C70.1 18.062,11.932 18.574,12.444 18.582,12.444 18.786,12.648 18.786,12.656 21.844,15.714 v1(21.844,16.002) ; R48.2@18.09,8.128 C70.1@18.09,10.414
IN4C: R15.1 X1.4 | length 5.8
  Bottom Layer w0.254: X1.4 7.398,11.636 R15.1@8.326,10.708
IN5: C64.1 D1.8 R42.2 | length 9.5
  Top Layer w0.254: C64.1 18.034,13.236 18.034,15.72 R42.2 ; R42.2@18.234,15.497 18.371,15.634 18.936,15.634 20.272,16.97 D1.8 ; D1.8@23.859,16.983 24.547,16.983 D1.8@24.552,16.987
IN5C: R3.1 X1.5 | length 5.9
  Top Layer w0.254: X1.5 5.89,14.176 6.858,13.208 R3.1@8.402,13.208
IN6: C65.1 D1.6 R43.2 | length 9.2
  Top Layer w0.254: v1(21.844,18.034) 21.908,17.97 D1.6
  Bottom Layer w0.254: R43.2@18.059,13.03 18.059,15.208 ; C65.1@18.062,15.24 18.094,15.208 18.376,15.49 19.046,15.49 21.59,18.034 v1(21.844,18.034)
IN6C: R5.1 X1.6 | length 6
  Bottom Layer w0.254: X1.6 7.144,16.716 R5.1@8.126,15.734 ; R5.1@8.126,15.48 8.326,15.28 R5.1@8.326,15.24
IN7: C67.1 D1.4 R45.2 | length 9
  Top Layer w0.254: R45.2 18.034,18.316 18.034,20.8 C67.1 ; C67.1@18.19,20.828 19.748,20.828 21.082,19.494 21.082,19.462 21.561,18.983 23.863,18.983 D1.4
IN7C: R9.1 X1.7 | length 5.9
  Top Layer w0.254: X1.7 5.382,19.256 6.35,18.288 R9.1
IN8: C69.1 D1.2 R47.2 | length 8.5
  Top Layer w0.254: v1(21.81,20.092) 21.958,20.092 22.173,20.307 22.235,20.307 22.572,19.97 D1.2
  Bottom Layer w0.254: R47.2 18.203,18.071 18.203,20.41 18.274,20.339 21.662,20.339 21.81,20.19 v1(21.81,20.092) ; C69.1 C69.1@18.327,20.817
IN8C: R13.1 X1.8 | length 5.9
  Bottom Layer w0.254: X1.8 6.895,21.796 8.23,20.462 R13.1@8.23,20.422
IN9: C71.1 D2.16 R49.2 | length 6.1
  Top Layer w0.254: D2.16 59.741,20.676 59.754,20.689 59.754,21.048 60.89,22.184 62.71,22.184 62.738,22.184 C71.1@62.738,24.413
IN9C: R17.1 X3.4 | length 9.2
  Top Layer w0.254: X3.4 65.51,26.67 69.85,26.67 71.184,25.336 71.184,24.645 R17.1@71.486,24.343
IN10: C73.1 D2.14 R51.2 | length 7.2
  Top Layer w0.254: D2.14 61.078,19.676 v1(61.976,20.574)
  Bottom Layer w0.254: v1@62.011,20.539 62.785,21.312 62.785,22.487 62.799,22.502 R51.2@62.723,22.502 ; R51.2 62.484,22.489 62.484,24.617 C73.1
IN10C: R23.1 X3.3 | length 6.5
  Bottom Layer w0.254: X3.3 68.304,26.416 70.358,26.416 71.47,25.304 71.47,24.945 R23.1@71.661,24.753
IN11: C75.1 D2.12 R53.2 | length 5.5
  Top Layer w0.254: D2.12 59.735,18.689 60.455,18.689 60.475,18.709 60.594,18.709 60.935,19.05 C75.1 62.738,19.022 62.738,17.437 63.223,16.952
IN11C: R27.1 X3.2 | length 14.8
  Top Layer w0.254: X3.2 69.496,28 73.66,23.836 73.66,17.526 72.898,16.764 71.745,16.764 71.72,16.739 R27.1@71.656,16.739
IN12: C77.1 D2.10 R55.2 | length 6.8
  Top Layer w0.254: D2.10 59.735,17.689 61.595,17.689 v1(61.693,17.787)
  Bottom Layer w0.254: v1@61.588,17.829 61.798,18.039 61.798,18.11 R55.2@62.456,18.768 ; R55.2 R55.2@62.456,18.768 ; C77.1@62.744,16.549 62.674,16.471 C77.1 R55.2@62.456,18.768
IN12C: R31.1 X3.1 | length 11.4
  Bottom Layer w0.254: R31.1@71.523,19.304 72.898,19.304 74,20.406 74,25.8 X3.1
IN13: C72.1 D2.8 R50.2 | length 7.6
  Top Layer w0.254: D2.8 59.735,16.663 61.569,16.663 62.484,15.748 62.738,15.494 62.738,13.744 R50.2 62.738,13.688 62.738,11.458 C72.1
IN13C: R19.1 X2.2 | length 10.7
  Top Layer w0.254: X2.2 69.479,3.219 70.082,3.219 71.201,4.338 71.201,4.399 72.984,6.182 72.984,10.199 R19.1@71.859,11.324
IN14: C74.1 D2.6 R52.2 | length 6.2
  Top Layer w0.254: D2.6 59.735,15.663 61.023,15.663 61.649,15.037 v1(61.649,14.949)
  Bottom Layer w0.254: v1@61.607,15.101 C74.1@62.752,13.956 ; R52.2@62.71,11.684 62.738,11.684 62.738,13.942 C74.1@62.71,13.97
IN14C: R21.1 X2.3 | length 17.5
  Top Layer w0.254: v1(72.644,4.737) 74,6.093 74,11.344 v1(72.644,12.7)
  Bottom Layer w0.254: X2.3 68.457,4.737 v1(72.644,4.737) ; R21.1@71.628,11.684 72.136,11.684 72.6,12.148 72.6,12.656 v1(72.644,12.7)
IN15: C76.1 D2.4 R54.2 | length 10.3
  Top Layer w0.254: D2.4 59.735,14.663 60.455,14.663 60.46,14.658 60.499,14.658 61.722,13.435 61.722,9.144 62.008,8.858 62.539,8.858 C76.1 ; R54.2@62.964,6.174 62.992,6.202 62.992,8.405 C76.1@62.964,8.433
IN15C: R25.1 X2.4 | length 8.7
  Top Layer w0.254: X2.4 65.498,4.318 69.85,4.318 R25.1@71.628,6.096
IN16: C78.1 D2.2 R56.2 | length 9.5
  Top Layer w0.254: D2.2 60.575,13.676 60.96,13.291 60.96,11.957 v1(60.941,11.938)
  Bottom Layer w0.254: v1(60.941,11.938) 61.045,11.834 61.045,11.496 61.675,10.867 62.456,10.085 C78.1
IN16C: R29.1 X2.1 | length 7.2
  Bottom Layer w0.254: X2.1 72.372,3.572 72.583,3.572 73.425,4.414 73.425,7.347 72.39,8.382 71.882,8.382 R29.1@71.845,8.419
NetA1_4: A1.4 R35.1 R36.2 | length 5.6
  Top Layer w0.254: A1.4 14.566,25.908 14.732,25.742 14.478,25.742 14.478,25.041 14.627,24.892 16.485,24.892 16.51,24.917 R35.1
NetA2_4: A2.4 R37.1 R38.2 | length 5
  Bottom Layer w0.381: A2.4 14.265,27.874 14.905,27.234 14.905,27.193 15.174,26.924 R38.2 16.27,26.91 18.528,26.91 R37.1
NetC1_2: C1.2 R1.2 R2.1 | length 5
  Top Layer w0.254: C1.2 9.906,5.56 9.906,3.076 R1.2 10.107,3.048 R2.1
NetC2_2: C2.2 C63.2 R2.2 | length 5
  Top Layer w0.254: R2.2 13.97,3.076 13.97,5.56 C2.2 C63.2
NetC3_2: C3.2 R3.2 R4.1 | length 5
  Top Layer w0.254: C3.2 9.906,15.72 9.906,13.236 R3.2 R4.1
NetC4_2: C4.2 C64.2 R4.2 | length 5
  Top Layer w0.254: C4.2 13.97,15.72 13.97,13.236 R4.2 C64.2
NetC5_2: C5.2 R5.2 R6.1 | length 4.9
  Bottom Layer w0.254: C5.2 9.874,13.24 9.874,15.462 9.938,15.526 cw(c10.014,15.449) 10.014,15.557 12.377,15.558 R6.1@12.441,15.621
NetC6_2: C6.2 C65.2 R6.2 | length 4.9
  Bottom Layer w0.254: R6.2@14.011,15.735 R6.2 C65.2 ; R6.2@14.135,15.507 14.135,13.272 C6.2 C6.2@14.275,13.183
NetC7_2: C7.2 R7.2 R8.1 | length 5.7
  Bottom Layer w0.254: C7.2@9.906,2.794 9.906,5.588 9.97,5.651 12.383,5.651 12.446,5.715 R8.1@12.776,5.715
NetC8_2: C8.2 C66.2 R8.2 | length 5.1
  Bottom Layer w0.254: C8.2@13.998,2.794 R8.2 ; C8.2@14.275,2.87 16.304,2.87 C66.2
NetC9_2: C9.2 R9.2 R10.1 | length 4.7
  Top Layer w0.254: R9.2 R10.1 ; C9.2@9.948,20.526 9.961,20.513 R9.2@9.961,18.288
NetC10_2: C10.2 C67.2 R10.2 | length 5
  Top Layer w0.254: R10.2 13.97,18.316 13.97,20.8 C10.2 C67.2
NetC11_2: C11.2 R11.2 R12.1 | length 5.1
  Top Layer w0.254: R11.2 9.906,8.156 9.906,10.64 C11.2 ; R11.2@10.218,7.989 10.271,8.042 R12.1@12.724,8.042
NetC12_2: C12.2 C68.2 R12.2 | length 4.7
  Top Layer w0.254: R12.2 13.97,8.156 13.97,10.64 C12.2 ; R12.2@14.361,8.112 14.368,8.105 14.379,8.117 16.448,8.117 16.485,8.153 C68.2@16.51,8.128
NetC13_2: C13.2 R13.2 R14.1 | length 4.9
  Bottom Layer w0.254: C13.2@9.845,18.069 9.845,20.386 9.81,20.422 R13.2@9.848,20.46 ; R13.2 R14.1
NetC14_2: C14.2 C69.2 R14.2 | length 5.1
  Bottom Layer w0.254: R14.2 C69.2 ; C14.2@14.148,18.186 14.214,18.253 14.214,20.432 R14.2@14.28,20.498
NetC15_2: C15.2 R15.2 R16.1 | length 5.3
  Bottom Layer w0.254: C15.2@9.906,8.128 9.906,10.668 9.97,10.605 12.58,10.605 R16.1@12.644,10.541
NetC16_2: C16.2 C70.2 R16.2 | length 4.9
  Bottom Layer w0.254: C16.2@14.122,8.052 14.173,8.103 14.173,10.49 14.224,10.541 14.287,10.478 16.447,10.478 C70.2@16.51,10.414
NetC17_2: C17.2 R17.2 R18.1 | length 3.8
  Top Layer w0.254: R18.1@68.087,22.121 68.087,22.25 68.189,22.352 69.71,22.352 C17.2 ; C17.2@69.893,22.464 69.893,24.331 R17.2@69.906,24.343
NetC18_2: C18.2 C71.2 R18.2 | length 4.6
  Top Layer w0.254: C71.2@64.008,24.658 C71.2 C18.2 66.294,24.63 66.294,22.4 R18.2
NetC19_2: C19.2 R19.2 R20.1 | length 4.1
  Top Layer w0.254: R20.1@68.054,11.466 R19.2@69.853,11.466 ; R19.2 C19.2
NetC20_2: C20.2 C72.2 R20.2 | length 3.8
  Top Layer w0.254: 64.798,11.43 R20.2 66.294,11.458 66.294,13.688 C20.2
NetC21_2: C21.2 R21.2 R22.1 | length 3.7
  Bottom Layer w0.254: 68.382,11.684 R21.2@69.822,11.684 ; R21.2 69.85,11.684 69.85,13.914 C21.2
NetC22_2: C22.2 C74.2 R22.2 | length 4.7
  Bottom Layer w0.254: C74.2@63.91,13.97 C22.2@66.294,13.97 ; R22.2 66.294,11.684 66.294,13.914 C22.2
NetC23_2: C23.2 R23.2 R24.1 | length 3.8
  Bottom Layer w0.254: R24.1@68.204,22.413 68.222,22.395 C23.2@69.822,22.395 ; C23.2 69.85,22.377 69.85,24.506 R23.2
NetC24_2: C24.2 C73.2 R24.2 | length 4.6
  Bottom Layer w0.254: C73.2 64.043,24.638 66.233,24.638 C24.2 66.294,24.643 66.294,22.413 R24.2
NetC25_2: C25.2 R25.2 R26.1 | length 4.3
  Top Layer w0.254: R26.1@67.846,6.35 69.822,6.35 69.85,6.378 69.85,8.608 C25.2
NetC26_2: C26.2 C76.2 R26.2 | length 4
  Top Layer w0.254: C76.2@64.61,8.316 64.676,8.382 66.055,8.382 C26.2@66.119,8.318 ; R26.2@65.984,6.096 R26.2@66.012,6.124 ; R26.2@66.294,6.124 66.294,8.156 C26.2@66.52,8.382
NetC27_2: C27.2 R27.2 R28.1 | length 4.1
  Top Layer w0.254: R28.1@68.057,16.749 68.108,16.698 R27.2@69.825,16.698 ; R27.2 69.85,16.767 69.85,18.997 C27.2
NetC28_2: C28.2 C75.2 R28.2 | length 3.7
  Top Layer w0.254: 64.798,19.05 66.124,19.05 66.294,18.88 66.294,16.777 R28.2 ; R28.2@66.446,16.723 R28.2@66.474,16.751
NetC29_2: C29.2 R29.2 R30.1 | length 4.7
  Bottom Layer w0.254: R30.1@67.846,5.842 C29.2@69.85,5.842 ; C29.2 C29.2@69.85,5.842 ; R29.2 69.85,8.45 C29.2@69.85,5.842
NetC30_2: C30.2 C78.2 R30.2 | length 5.4
  Bottom Layer w0.254: C78.2@63.666,5.814 R30.2 66.294,5.842 66.294,8.58 C30.2
NetC31_2: C31.2 R31.2 R32.1 | length 4.6
  Bottom Layer w0.254: R32.1@68.292,16.256 C31.2@69.85,16.256 ; C31.2 C31.2@69.85,16.256 ; R31.2 69.85,19.248 C31.2@69.85,16.256
NetC32_2: C32.2 C77.2 R32.2 | length 5.3
  Bottom Layer w0.254: C77.2@64.036,16.256 R32.2@66.294,16.256 ; R32.2 R32.2@66.294,16.256 ; C32.2 66.294,19.248 R32.2@66.294,16.256
NetC33_1: C33.1 D1.64 | length 3.3
  Top Layer w0.203: D1.64 25.806,23.044 25.841,23.078 25.841,23.29 26.493,23.942 26.493,24.23 26.592,24.328 26.879,24.328 C33.1@26.879,25.07
NetC34_1: C34.1 C46.1 D1.55 | length 7.5
  Top Layer w0.203: D1.55 30.306,18.663 v1(30.454,18.516)
  Bottom Layer w0.203: C46.1 28.794,17.089 30.679,17.089 30.694,17.074 C34.1 30.734,18.288 30.506,18.516 v1(30.454,18.516)
NetC35_1: C35.1 D1.26 | length 3.3
  Top Layer w0.203: D1.26 30.336,11.01 30.336,8.167 C35.1
NetC36_1: C36.1 D1.28 | length 3.9
  Top Layer w0.203: D1.28 31.306,8.882 C36.1@32.104,8.084 ; C36.1@32.104,8.338 32.104,8.298 32.472,7.93 C36.1
NetC37_1: C37.1 D1.30 | length 4.3
  Top Layer w0.203: D1.30 32.306,9.742 C37.1@34.377,7.671 ; C37.1@34.377,7.925 C37.1
NetC38_2: C38.2 R39.2 R40.1 | length 4.6
  Top Layer w0.254: R39.2@51.206,6.02 51.216,6.03 C38.2@51.216,8.128 ; C38.2@51.227,8.204 51.303,8.128 R40.1@53.406,8.128 ; R40.1@53.457,8.179 R40.1@53.406,8.128 ; R40.1@53.66,8.128 R40.1@53.406,8.128
NetC39_1: C39.1 D2.64 | length 3.5
  Top Layer w0.203: D2.64 57.792,11.214 57.83,11.176 v1(58.928,11.176)
  Bottom Layer w0.203: v1(58.928,11.176) 59.452,11.176 60.666,9.962 C39.1
NetC40_1: C40.1 D2.26 | length 6.3
  Top Layer w0.203: D2.26 53.292,23.574 v1(53.848,24.13)
  Bottom Layer w0.203: v1(53.848,24.13) 54.61,23.368 C40.1@54.61,21.036 ; C40.1@54.356,20.625 54.356,21.29 C40.1@54.61,21.036 ; C40.1 C40.1@54.61,21.036
NetC41_1: C41.1 D2.28 | length 5.7
  Top Layer w0.203: D2.28 52.292,24.479 v1(52.324,24.511)
  Bottom Layer w0.203: v1(52.324,24.511) 52.324,24.384 52.578,24.13 52.578,23.995 52.578,20.986 C41.1
NetC42_1: C42.1 D2.30 | length 5.8
  Top Layer w0.203: v1(50.8,24.448) 51.292,23.955 D2.30
  Bottom Layer w0.203: C42.1@50.521,20.851 C42.1 50.521,24.105 50.8,24.384 v1(50.8,24.448)
NetC45_2: C45.2 C79.2 R40.2 | length 4.1
  Top Layer w0.254: R40.2@55.037,8.179 55.049,8.166 C45.2@55.049,6.134 ; C45.2@55.303,6.134 57.361,6.134 C79.2
NetC51_1: C51.1 C52.1 D2.55 | length 6.5
  Top Layer w0.203: D2.55 53.292,11.911 53.305,11.924 53.305,12.665 54.004,13.364 54.051,13.364 54.375,13.688 v1@54.536,13.688
  Bottom Layer w0.203: v1(54.536,13.942) 54.536,14.912 54.61,14.986 C51.1 C52.1@56.705,15.212
NetC61_2: C61.2 D1.24 | length 5.7
  Top Layer w0.254: D1.24 29.306,13.05 v1@29.464,13.208
  Bottom Layer w0.254: v1(29.464,13.462) 29.944,13.942 C61.2
NetC62_2: C62.2 D2.24 | length 3.5
  Top Layer w0.203: D2.24 54.33,22.644 54.33,23.544 55.428,24.641 C62.2
REF: C79.1 D1.1 D1.3 D1.5 D1.7 D1.9 D1.11 D1.13 D1.15 D2.1 D2.3 D2.5 D2.7 D2.9 D2.11 D2.13 D2.15 R57.2 | length 86.9
  Top Layer w0.203: D1.15 25.048,13.47 25.167,13.589 25.167,14.523 ; D1.13 25.114,14.47 25.167,14.523 ; D1.11 25.154,15.47 25.167,15.457 ; D1.9 25.165,16.47 25.167,16.473 ; D1.7 25.149,17.47 25.167,17.489 ; D1.5 25.133,18.47 25.167,18.505 ; D1.3 25.117,19.47 25.167,19.521 ; D1.1 23.898,20.492 25.048,20.492 25.167,20.373 25.167,19.521 ; v1(57.15,13.716) 57.658,14.224 58.391,14.224 ; D2.1@59.034,13.128 58.391,13.77 58.391,14.224 ; D2.1 59.944,12.954 ; D2.3 58.439,14.176 58.391,14.224 ; D2.5 58.544,15.176 58.391,15.023 ; D2.7 58.478,16.176 58.391,16.263 ; D2.9 58.494,17.176 58.391,17.279 ; D2.11 58.51,18.176 58.391,18.295 ; D2.13 58.51,19.176 58.391,19.057 ; D2.15 59.082,20.176 59.044,20.138 58.961,20.138 58.391,19.568 58.391,19.057 ; 25.167,14.523 25.167,15.457 ; 25.167,15.457 25.167,16.473 ; 25.167,16.473 25.167,17.489 ; 25.167,17.489 25.167,18.505 ; 25.167,18.505 25.167,19.521 ; 58.391,14.224 58.391,15.023 ; 58.391,15.023 58.391,16.176 58.391,16.263 ; 58.391,16.263 58.391,17.279 ; 58.391,17.279 58.391,18.295 ; 58.391,18.295 58.391,19.057
  Top Layer w0.254: 25.048,13.47 25.048,5.94 26.499,4.489 v1(40.386,4.489) ; C79.1 58.953,8.179 59.944,9.169 59.944,12.954
  Bottom Layer w0.254: v1(40.386,4.489) 41.764,5.867 49.301,5.867 v1(57.15,13.716)
REFC: R39.1 X2.5 | length 13.6
  Top Layer w0.254: R39.1@49.626,6.02 49.84,5.806 49.84,5.278 50.546,4.572 60.068,4.572 X2.5
RLDOUT: D1.62 D1.63 R41.1 R42.1 R43.1 R44.1 R45.1 R46.1 R47.1 R48.1 | length 44.4
  Top Layer w0.254: v1(15.24,11.938) v1@15.24,10.01 ; v1(15.24,14.732) 15.344,14.836 15.344,15.09 16.034,15.78 R42.1@16.51,15.78 ; v1@15.339,4.384 15.339,4.231 16.482,3.088 R41.1 ; v1@15.344,10.01 15.344,9.756 15.24,9.861 v1@15.24,10.01 ; v1@15.344,17.376 R45.1@16.034,18.066 ; R42.1 16.51,15.776 R42.1@16.51,15.78 ; R45.1 16.51,18.26 R42.1@16.51,15.78 ; R46.1@16.704,10.7 16.555,10.55 15.78,10.55 v1@15.24,10.01 ; v1(26.162,18.796) 26.806,19.44 D1.62 D1.63
  Bottom Layer w0.254: v1(15.24,14.732) v1(15.24,11.938) v1@15.344,12.042 ; v1(15.24,17.018) 16.56,17.018 ; v1@15.344,12.296 16.034,12.986 R43.1@16.704,12.986 ; v1@15.364,3.912 15.364,5.69 ; v1@15.494,9.432 15.39,9.328 15.39,9.036 15.364,9.011 15.364,5.69 ; R48.1@16.099,8.511 16.139,8.511 16.482,8.168 R48.1 ; R44.1 15.466,5.588 15.364,5.69 ; R48.1@16.51,8.128 16.561,8.077 16.561,5.791 R44.1@16.612,5.74 ; R47.1 16.56,17.985 16.56,17.018 ; v1(26.162,18.796) 26.143,18.815 20.254,18.815 18.457,17.018 16.56,17.018 ; R43.1@16.228,13.208 16.304,13.37 16.482,13.446 16.825,13.591 16.482,13.248 R43.1 R43.1@16.228,13.208
  other v1: 15.21,4.232 15.24,9.652
RLDOUT2: D2.62 D2.63 R49.1 R50.1 R51.1 R52.1 R53.1 R54.1 R55.1 R56.1 R57.1 | length 38
  Top Layer w0.203: D2.62 57.042,11.246 ; v1@57.085,9.347 57.085,8.418 R57.1 ; v1@57.15,9.398 57.15,11.138 57.042,11.246 ; D2.63 57.042,11.246 ; v1(60.96,5.08) 64.262,5.08 64.461,5.279 64.461,6.091 R54.1@64.544,6.174 ; R53.1@64.262,16.683 64.262,13.716 65.149,12.829 65.149,12.815 65.47,12.494 ; R54.1@64.278,6.174 64.516,6.412 64.516,7.211 64.635,7.33 65.242,7.33 v1(65.278,7.366) ; R53.1@64.584,17.074 65.278,17.768 v1(65.278,17.78) ; v1(65.024,12.7) 65.168,12.7 65.422,12.446 ; 65.532,12.446 65.422,12.446 ; 65.554,12.578 65.47,12.494 ; 65.422,12.446 65.47,12.494
  Top Layer w0.254: v1(64.008,20.574) 64.008,20.722 64.262,20.976 R49.1@64.262,22.029
  Bottom Layer w0.203: v1@57.15,9.398 57.15,6.858 58.928,5.08 v1(60.96,5.08) ; R55.1@64.008,19.122 64.008,18.542 64.729,17.821 65.237,17.821 v1(65.278,17.78)
  Bottom Layer w0.254: R52.1@64.008,11.643 64.008,8.636 v1(65.278,7.366) ; R52.1 64.119,11.714 64.738,11.714 64.835,11.811 64.875,11.811 65.024,11.96 v1(65.024,12.7) ; R55.1 64.036,19.241 64.062,19.189 64.096,19.122 R55.1@64.207,19.081 ; R51.1@64.262,22.461 64.008,22.207 v1(64.008,20.574) 64.008,19.459 R55.1@64.29,19.177
  other v1: 57.153,9.347
SCLK: D1.40 D2.40 X3.13 | length 26.3
  Top Layer w0.203: D1.40 35.876,16.47 35.914,16.508 36.03,16.508 36.582,17.061 36.582,17.077 37.025,17.52 v1(39.135,17.52) ; v1(46.508,15.976) 46.482,16.002 46.482,16.203 47.446,17.168 48.354,17.168 D2.40
  Bottom Layer w0.203: v1@39.11,17.52 40.627,16.002 46.482,16.002 v1(46.508,15.976) ; v1(39.135,17.52) 39.11,17.545 39.11,25.79 X3.13
START: D1.38 D2.38 X2.15 | length 39.3
  Top Layer w0.203: D1.38 35.24,15.474 35.769,15.474 35.773,15.47 37.108,15.47 v1(37.338,15.24) v1@37.338,15.401 ; D2.38 48.4,18.138 50.314,18.138 v1(50.417,18.034) ; v1@37.338,15.401 37.499,15.24 37.245,15.494 v1@37.338,15.401
  Bottom Layer w0.203: X2.15 37.338,4.098 37.338,6.35 ; v1(37.338,15.24) 37.338,6.35 ; v1(50.417,18.034) 50.417,17.905 48.006,15.494 48.006,9.652 44.704,6.35 37.338,6.35
pads on no net: D1.17 D1.18 D1.27 D1.29 D1.37 D1.42 D1.44 D1.45 D1.46 D1.60 D1.61 D2.17 D2.18 D2.27 D2.29 D2.37 D2.42 D2.44 D2.45 D2.46 D2.47 D2.60 D2.61 X2.6 X2.7 X2.8 X2.9 X2.10 X2.11 X2.13 X2.14 X2.16 X2.17 X2.18 X3.5 X3.6 X3.7 X3.8 X3.9 X3.10 X3.11 X3.16 X3.17 X3.18 X3.19 X3.20

## Polygon pours and split planes (outlines as drawn)
BAT_GND on Bottom Layer "BAT_GND_L02_P009" (solid, pour order 9): 1,29.492 1.028,29.464 31.496,29.464 31.496,8.128 52.832,8.128 52.832,29.21 52.578,29.464 52.606,29.492 74.93,29.492 74.93,0.492 1,0.492
DGND on Bottom Layer "DGND_L02_P007" (solid, pour order 7): 31.496,29.464 31.496,8.128 52.578,8.128 52.578,29.464
no net on Bottom Layer "NONET_L02_P000" (solid, pour order 0): 37.338,7.112
no net on Top Layer "NONET_L01_P011" (solid, pour order 11): 0.864,29.777 0.892,29.749 31.36,29.749 31.36,8.413 52.696,8.413 52.696,29.495 52.442,29.749 52.47,29.777 75,29.777 75,0.777 0.864,0.777
no net on Top Layer "NONET_L01_P010" (solid, pour order 10): 31.496,29.972 31.496,8.636 52.578,8.636 52.578,29.972
no net on Top Layer "NONET_L01_P008" (solid, pour order 8): 1.016,30.226
no net on Top Layer "NONET_L01_P006" (solid, pour order 6): 32.004,29.21

## Keep-outs
Keep-Out Layer:
  lines w0.254: 1,1 1,30 75,30 75,1 1,1

## Silkscreen, mask and mechanical layers (free items; w line width, h text height)
Top Overlay:
  text "/CS1" at 35.052,29.475 h1.02
  text "DIN" at 37.846,29.464 h1.02
  text "SCLK" at 40.132,29.475 h1.02
  text "DOUT" at 43.18,29.475 h1.02
  text "9" at 64.008,29.221 h1.02
  text "10" at 66.294,29.221 h1.02
  text "11" at 68.834,29.21 h1.02
  text "12" at 71.374,29.21 h1.02
  text "+" at 2.54,28.597 h1.02
  text "HDsEMG" at 57.15,25.411 h1.02
  text "V1.0" at 58.189,24.516 h1.02
  text "V_BAT" at 9.907,23.294 h1.02
  text "8" at 4.826,22.109 h1.02
  text "7" at 4.826,19.558 h1.02
  text "6" at 4.826,17.029 h1.02
  text "5" at 4.826,14.564 h1.02
  text "4" at 4.826,11.938 h1.02
  text "3" at 4.826,9.409 h1.02
  text "2" at 4.825,6.858 h1.02
  text "DGND" at 19.812,4.583 h1.02
  text "5V" at 23.368,4.583 h1.02
  text "GND" at 25.146,4.583 h1.02
  text "START" at 35.306,4.583 h1.02
  text "/CS2" at 43.18,4.583 h1.02
  text "1" at 4.826,4.318 h1.02
  text "REF" at 60.706,4.318 h1.02
  text "15" at 63.5,4.329 h1.02
  text "14" at 66.294,4.318 h1.02
  text "13" at 69.088,4.329 h1.02
  text "16" at 71.374,4.329 h1.02
Mechanical 1:
  lines w0.254: 0,0 0,31 76,31 76,23.25 76,7.75 76,0 0,0